# EAGLE board Handclap-TR808 (EAGLE 7.6.0)
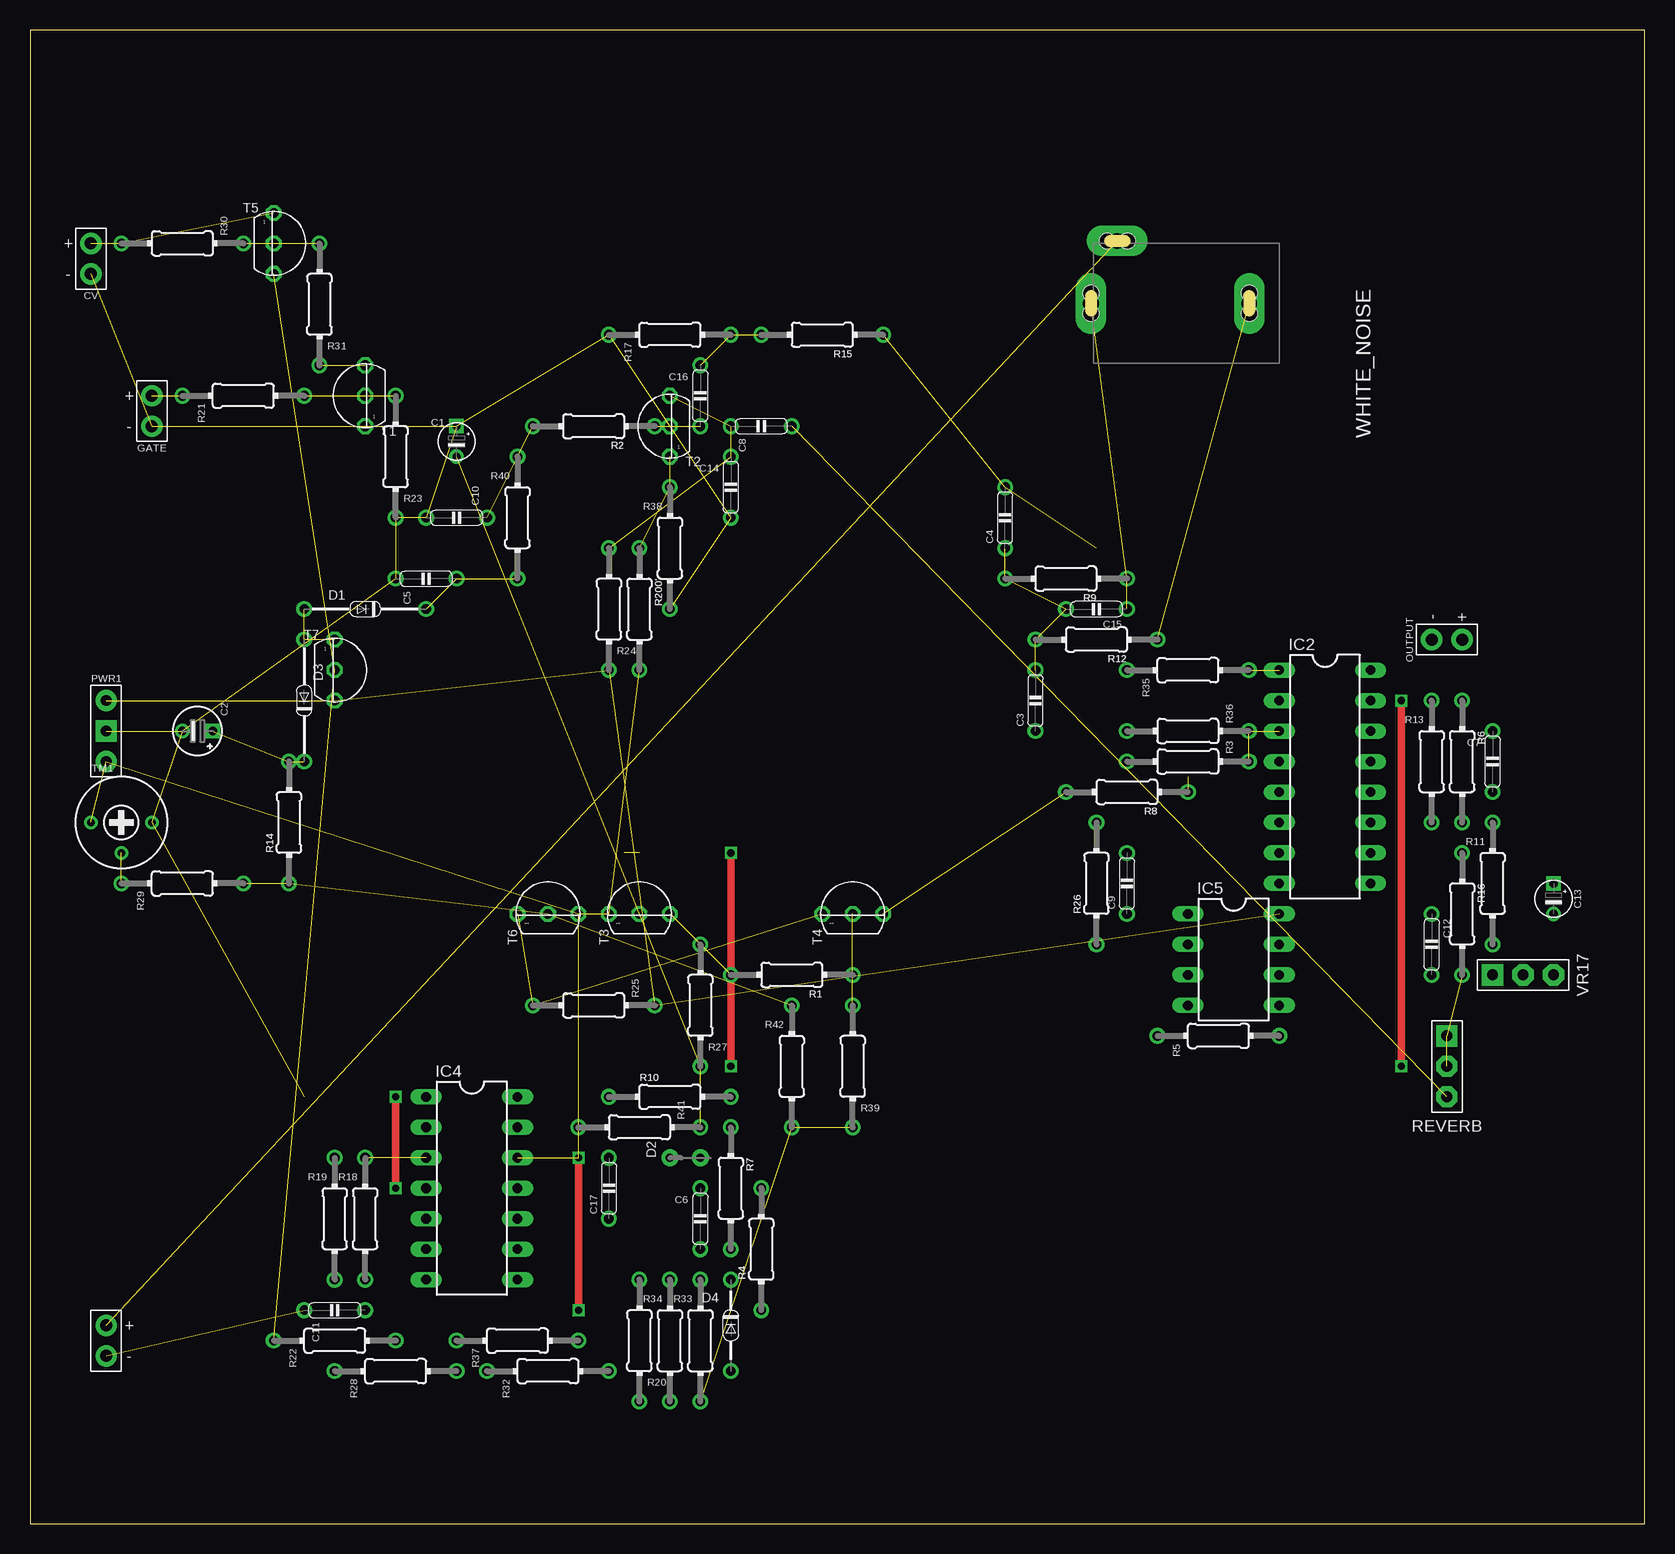
[diagram p0: board, top side]
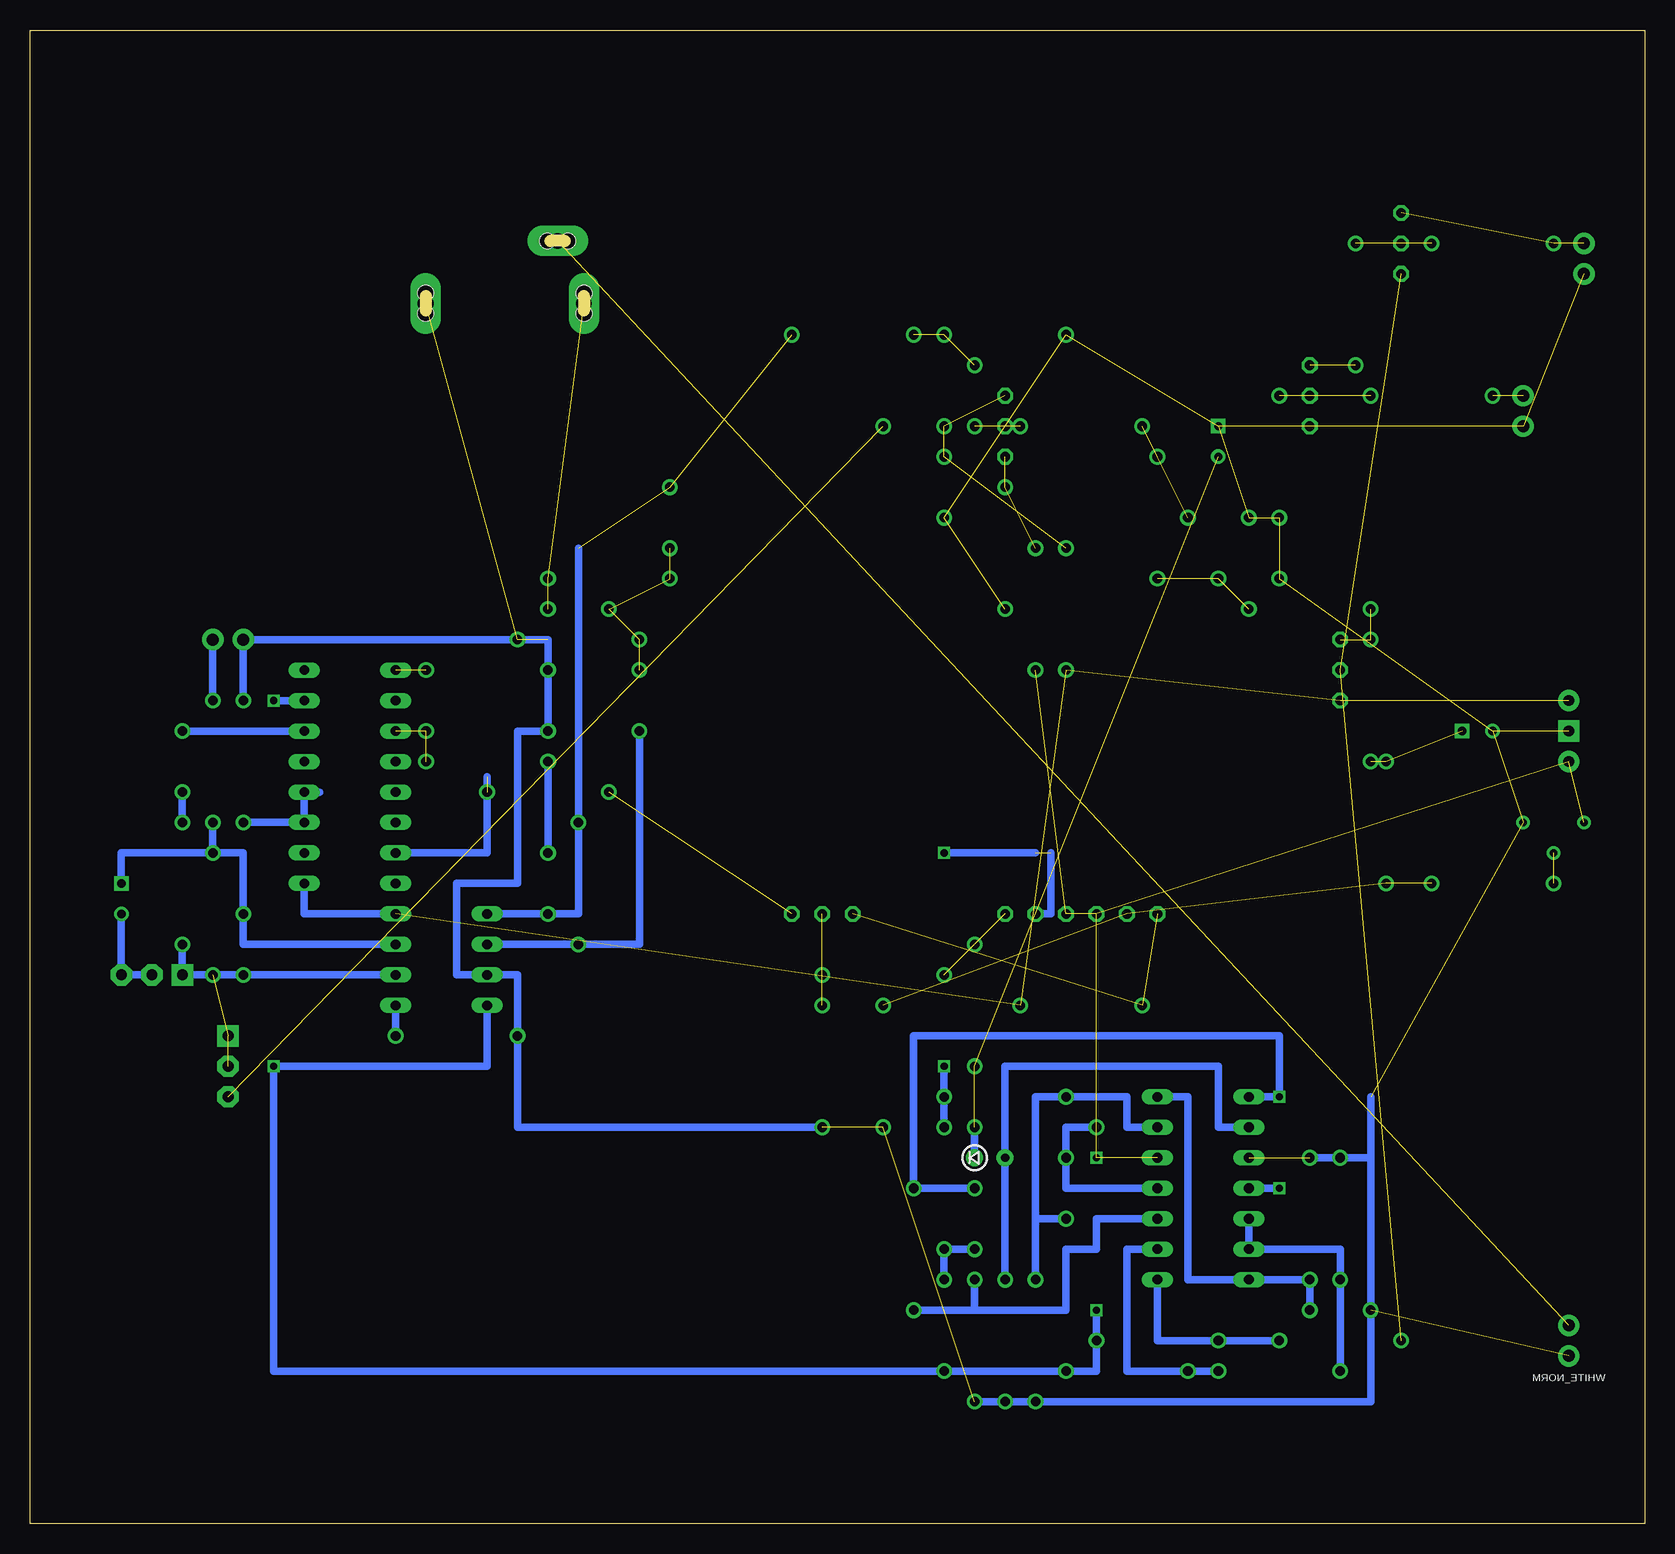
[diagram p1: board, bottom side, seen from below]

Size 134.62 x 124.46 mm. Coordinates in mm from the lower left corner, seen from the top.
Outline: 0,0 134.62,0 134.62,124.46 0,124.46 0,0
Copper layers (1*16): Top 0.035mm / dielectric 1.5mm / Bottom 0.035mm
Design rules "default": minimum track width 10mil, minimum drill 24mil, track to track 8mil, track to pad 8mil, pad to pad 8mil, via to via 8mil, smd to smd 8mil, copper to edge 40mil, drill to drill 8mil, minimum pad ring 10mil, minimum via ring 8mil, stop-mask expansion 4mil, vias tented up to drill 0mil, thermal gap 10mil
Net classes: 0 default: width 0.61 mm; 1 GND: width 0.61 mm; 2 Power: width 0.61 mm; 3 special: width 0.61 mm; 4 15v: width 0.61 mm

## Footprints (pad centres in the part's own frame; a part is rotated, then mirrored left to right if it is on the bottom)
E2,5-3/V = drill 0.7 square: + 0,1.27 | drill 0.7: - 0,-1.27
E2.5-4/V = drill 0.7 square: + 0,1.27 | drill 0.7: - 0,-1.27
C050-020X044 = drill 0.8: 1 -2.54,0; 2 2.54,0
C050-020X044/V = drill 0.8: 1 0,2.54; 2 0,-2.54
E2,5-3 = drill 0.7 square: + -1.27,0 | drill 0.7: - 1.27,0
SPAD-+ = drill 1 pad 1.778: 1 0,-1.27; 2 0,1.27
DO34-10 = drill 0.8: A 5.08,0; C -5.08,0
DO34-2,5-A/V = drill 0.7 pad 1.422: A 0,1.27; C 0,-1.27
DO34-7V = drill 0.8: A 0,-3.81; C 0,3.81
DIL16 = drill 0.8 long: 1 -3.81,8.89; 2 -3.81,6.35; 3 -3.81,3.81; 4 -3.81,1.27; 5 -3.81,-1.27; 6 -3.81,-3.81; 7 -3.81,-6.35; 8 -3.81,-8.89; 9 3.81,-8.89; 10 3.81,-6.35; 11 3.81,-3.81; 12 3.81,-1.27; 13 3.81,1.27; 14 3.81,3.81; 15 3.81,6.35; 16 3.81,8.89
DIL14 = drill 0.8 long: 1 -3.81,7.62; 2 -3.81,5.08; 3 -3.81,2.54; 4 -3.81,0; 5 -3.81,-2.54; 6 -3.81,-5.08; 7 -3.81,-7.62; 8 3.81,-7.62; 9 3.81,-5.08; 10 3.81,-2.54; 11 3.81,0; 12 3.81,2.54; 13 3.81,5.08; 14 3.81,7.62
DIL08 = drill 0.8 pad 1.27 long: 1 -3.81,3.81; 2 -3.81,1.27; 3 -3.81,-1.27; 4 -3.81,-3.81; 5 3.81,-3.81; 6 3.81,-1.27; 7 3.81,1.27; 8 3.81,3.81
SPAD-PWR-+GND- = drill 0.9 pad 1.778 square: GND 0,0 | drill 0.9 pad 1.778: VCC 0,2.54; VEE 0,-2.54
0204/10 = drill 0.8: 1 -5.08,0; 2 5.08,0
0204/10-V = drill 0.8: 1 0,5.08; 2 0,-5.08
CONN-3P = drill 0.9 pad 1.778 square: 1 0,-2.54 | drill 0.9 pad 1.778 octagon: 2 0,0; 3 0,2.54
TO92 = drill 0.8 octagon: 1 0,2.54; 2 0,0; 3 0,-2.54
R-TRIM = drill 0.61: 1 -2.54,0; 2 0,-2.54; 3 2.54,0
ERTHENVAR-JACK-90DEG = drill 1.3 pad 2.54 long: P$1 5,-2.5; P$2 -0.2,-13.5; P$3 5,-15.7 | hole 1.3: 5.842,-2.489; 4.14,-2.489; -0.203,-12.649; -0.203,-14.351; 5.842,-15.697; 4.166,-15.697
SPAD+- = drill 1 pad 1.778: 1 0,-1.27; 2 0,1.27

## Placement (x,y rotation side)
C1  .47/50  [E2,5-3/V]  35.56,90.17 0 top
C2  1/50  [E2.5-4/V]  13.97,66.04 270 top
C3  4.7n  [C050-020X044]  83.82,68.58 90 top
C4  4.7n  [C050-020X044]  81.28,83.82 90 top
C5  18n  [C050-020X044/V]  33.02,78.74 90 top
C6  1n  [C050-020X044/V]  55.88,25.4 0 top
C7  1n  [C050-020X044/V]  121.92,63.5 0 top
C8  4.7n  [C050-020X044/V]  60.96,91.44 90 top
C9  22n  [C050-020X044]  91.44,53.34 90 top
C10  47n  [C050-020X044/V]  35.56,83.82 270 top
C11  27n  [C050-020X044/V]  25.4,17.78 90 top
C12  220p  [C050-020X044]  116.84,48.26 270 top
C13  33/6.3  [E2,5-3]  127,52.07 270 top
C14  18n  [C050-020X044/V]  58.42,86.36 0 top
C15  1.8n  [C050-020X044]  88.9,76.2 180 top
C16  33n  [C050-020X044/V]  55.88,93.98 0 top
C17  220p  [C050-020X044]  48.26,27.94 90 top
CV  [SPAD-+]  5.08,105.41 0 top
D1  1N4148  [DO34-10]  27.94,76.2 180 top
D2  1N4148  [DO34-2,5-A/V]  54.61,30.48 90 top
D3  1N4148  [DO34-10]  22.86,68.58 90 top
D4  1N4148  [DO34-7V]  58.42,16.51 0 top
GATE  [SPAD-+]  10.16,92.71 0 top
IC2  BA6110  [DIL16]  107.95,62.23 0 top
IC4  LM339N  [DIL14]  36.83,27.94 0 top
IC5  TL072P  [DIL08]  100.33,46.99 0 top
OUTPUT  [SPAD-+]  118.11,73.66 270 top
PWR1  -12V_GND_+12V-VCC-VEE  [SPAD-PWR-+GND-]  6.35,66.04 0 top
R1  470K  [0204/10]  63.5,45.72 180 top
R2  1M  [0204/10]  46.99,91.44 180 top
R3  39K  [0204/10-V]  96.52,63.5 270 top
R4  2K7  [0204/10]  60.96,22.86 90 top
R5  47K  [0204/10-V]  99.06,40.64 90 top
R6  1K  [0204/10]  119.38,63.5 270 top
R7  68K  [0204/10]  58.42,27.94 270 top
R8  10K  [0204/10]  91.44,60.96 180 top
R9  27K  [0204/10]  86.36,78.74 180 top
R10  68K  [0204/10]  53.34,35.56 0 top
R11  100K  [0204/10-V]  121.92,53.34 0 top
R12  10K  [0204/10]  88.9,73.66 180 top
R13  82K  [0204/10-V]  116.84,63.5 0 top
R14  330K  [0204/10]  21.59,58.42 90 top
R15  15K  [0204/10]  66.04,99.06 180 top
R16  470K  [0204/10]  119.38,50.8 270 top
R17  680  [0204/10-V]  53.34,99.06 90 top
R18  1M  [0204/10-V]  27.94,25.4 0 top
R19  4K7  [0204/10-V]  25.4,25.4 0 top
R20  10K  [0204/10-V]  50.8,15.24 180 top
R21  22K  [0204/10-V]  17.78,93.98 90 top
R22  27K  [0204/10-V]  25.4,15.24 90 top
R23  10K  [0204/10-V]  30.48,88.9 180 top
R24  10K  [0204/10-V]  48.26,76.2 180 top
R25  15K  [0204/10-V]  46.99,43.18 270 top
R26  150K  [0204/10]  88.9,53.34 90 top
R27  330  [0204/10-V]  55.88,43.18 180 top
R28  4K7  [0204/10-V]  30.48,12.7 90 top
R29  47K  [0204/10-V]  12.7,53.34 90 top
R30  4K7  [0204/10-V]  12.7,106.68 270 top
R31  10K  [0204/10-V]  24.13,101.6 180 top
R32  4K7  [0204/10-V]  43.18,12.7 90 top
R33  5K6  [0204/10-V]  55.88,15.24 0 top
R34  82K  [0204/10-V]  53.34,15.24 0 top
R35  1K  [0204/10-V]  96.52,71.12 90 top
R36  1K  [0204/10-V]  96.52,66.04 270 top
R37  22K  [0204/10-V]  40.64,15.24 90 top
R38  330R  [0204/10-V]  53.34,81.28 0 top
R39  15K  [0204/10-V]  68.58,38.1 180 top
R40  1M  [0204/10-V]  40.64,83.82 0 top
R41  1M  [0204/10-V]  50.8,33.02 270 top
R42  2K2  [0204/10-V]  63.5,38.1 0 top
R200'  10K  [0204/10]  50.8,76.2 270 top
REVERB  100k  [CONN-3P]  118.11,38.1 180 top
T1  2N3904  [TO92]  27.94,93.98 180 top
T2  2N3904  [TO92]  53.34,91.44 180 top
T3  2N3904  [TO92]  50.8,50.8 90 top
T4  2N3906  [TO92]  68.58,50.8 90 top
T5  2N3906  [TO92]  20.32,106.68 0 top
T6  2N3906  [TO92]  43.18,50.8 90 top
T7  2N3904  [TO92]  25.4,71.12 0 top
TM1  10K(B)  [R-TRIM]  7.62,58.42 0 top
VR17  100K(A)  [CONN-3P]  124.46,45.72 270 top
WHITE_NOISE  AUDIO-JACK  [ERTHENVAR-JACK-90DEG]  104.14,106.68 270 top
WHITE_NORM  [SPAD+-]  6.35,15.24 0 top

## Library data of the parts
C1-C17 = c
CV GATE OUTPUT PWR1 WHITE_NORM = pad
D1-D4 = d
IC2 IC4 IC5 = ic
R1-R42 R200' REVERB TM1 VR17 = r
T1-T7 = t
WHITE_NOISE = erthenvar

## Nets
+12V [Power]: IC2.9 IC5.8 PWR1.VCC R24.1 R25.1 T7.3
-12V: D4.A IC2.15 IC4.12 IC5.4 PWR1.VEE R32.2 R37.2 R200'.2 T3.1 T6.3 TM1.1
A_OUT: D2.A IC4.2 R34.1
B_OUT: C6.1 IC4.1 IC4.4 R4.2
C_OUT: C11.2 IC4.7 IC4.14 R18.2
CV: CV.2 R30.2 T5.1
D_OUT: C17.1 IC4.13 R10.1 R20.2
GATE: GATE.2 R21.1
GND [GND]: C1.+ C2.- C5.1 C10.2 C11.1 C14.2 CV.1 GATE.1 IC4.3 IC5.3 OUTPUT.1 PWR1.GND R5.1 R12.1 R13.1 R17.1 R18.1 R19.1 R20.1 R23.1 R33.2 R34.2 R35.1 R36.2 R38.2 R39.1 R42.2 T1.1 TM1.3 WHITE_NOISE.P$1 WHITE_NORM.1
N$1: OUTPUT.2 R6.1
N$2: WHITE_NOISE.P$2 WHITE_NORM.2
N$3: R31.1 T1.3
N$4: R21.2 R23.2 T1.2
N$10: C4.2 C9.1 IC5.1 R15.1 R26.2
N$37: R30.1 R31.2 T5.2
N$40: C16.2 R2.1 T2.2
N$41: C5.2 D1.C R40.2
N$42: R38.1 R200'.1 T2.1
N$43: R22.1 T5.3 T7.2
N$44: D1.A D3.A T7.1
N$45: C10.1 R2.2 R40.1
N$46: C8.1 C14.1 R24.2 T2.3
N$47: C2.+ D3.C R14.2
N$48: R14.1 R29.2 R42.1 T6.2
N$49: R29.1 TM1.2
N$50: C16.1 R15.2 R17.2
N$52: C3.2 C4.1 C15.2 R9.2 R12.2
N$54: C3.1 IC5.2 R26.1
N$55: C9.2 R3.2
N$56: IC2.3 R3.1 R36.1
N$57: C8.2 REVERB.3
N$59: IC2.1 R35.2
N$60: IC2.7 R8.1
N$61: IC2.11 IC2.12 R13.2
N$62: C7.2 R11.1
N$63 [special]: C7.1 IC2.14
N$64: IC4.5 IC4.6 R19.2 R28.1
N$65: C1.- D2.C R27.1 R41.1
N$66: R1.1 R39.2 T4.2
N$67: R25.2 T4.1 T6.1
N$69: R8.2 T4.3
N$70: R1.2 R27.2 T3.3
N$71: IC4.9 R28.2 R32.1
N$72: C17.2 IC4.11 R41.2
N$73: IC4.10 R4.1 R33.1
N$74: IC4.8 R22.2 R37.1
N$75: R7.1 R10.2 T3.2
N$76: C6.2 D4.C R7.2
N$91: IC5.5 R5.2
N$92 [special]: C12.2 IC5.6 R11.2 R16.2 REVERB.1 REVERB.2 VR17.1
N$95: C13.- VR17.2 VR17.3
N$97: C12.1 C13.+ IC5.7 R6.2 R16.1
WN: C15.1 R9.1 WHITE_NOISE.P$3

## Tracks (layer width: path | path; a pad name or v marks a point on that pad's centre or on a via)
+12V  (4 unrouted)
  Bottom 0.61: IC5.8 111.76,50.8 IC2.9
-12V  (via drill 0.6)  (6 unrouted)
  Top 0.61: v45.72,30.48 v45.72,17.78 | v114.3,68.58 v114.3,38.1
  Bottom 0.61: v45.72,17.78 R37.2 45.72,12.7 R32.2 D4.A 114.3,12.7 v114.3,38.1 96.52,38.1 IC5.4 | IC2.15 v114.3,68.58
A_OUT
  Bottom 0.61: IC4.2 35.56,33.02 35.56,38.1 53.34,38.1 D2.A R34.1
B_OUT  (via drill 0.6)
  Top 0.61: v30.48,35.56 v30.48,27.94
  Bottom 0.61: IC4.1 v30.48,35.56 30.48,40.64 60.96,40.64 60.96,29.21 R4.2 | v30.48,27.94 IC4.4 | R4.2 C6.1 R4.2
C_OUT
  Bottom 0.61: IC4.14 38.1,35.56 38.1,20.32 IC4.7 R18.2 C11.2
CV  (2 unrouted)
D_OUT
  Bottom 0.61: IC4.13 43.18,33.02 43.18,35.56 R10.1 50.8,35.56 50.8,25.4 | R20.2 50.8,25.4 | C17.1 50.8,25.4
GATE  (1 unrouted)
GND  (19 unrouted)
  Bottom 0.61: 22.86,30.48 R18.1 R19.1 | 22.86,30.48 22.86,35.56 | R33.2 R34.2 R20.1 22.86,10.16 C11.1 22.86,30.48 | R13.1 OUTPUT.1 91.44,73.66 R35.1 R36.2 93.98,66.04 93.98,53.34 99.06,53.34 99.06,45.72 IC5.3 93.98,45.72 R5.1 93.98,33.02 R39.1
N$1
  Bottom 0.61: OUTPUT.2 R6.1
N$2  (1 unrouted)
N$3  (1 unrouted)
N$4  (2 unrouted)
N$10  (2 unrouted)
  Bottom 0.61: 88.9,81.28 R26.2 88.9,50.8 C9.1 IC5.1
N$37  (2 unrouted)
N$40  (2 unrouted)
N$41  (2 unrouted)
N$42  (2 unrouted)
N$43  (2 unrouted)
N$44  (2 unrouted)
N$45  (2 unrouted)
N$46  (3 unrouted)
N$47  (2 unrouted)
N$48  (3 unrouted)
N$49  (1 unrouted)
N$50  (2 unrouted)
N$52  (4 unrouted)
N$54
  Bottom 0.61: IC5.2 R26.1 83.82,48.26 C3.1
N$55
  Bottom 0.61: R3.2 C9.2
N$56  (2 unrouted)
N$57  (1 unrouted)
N$59  (1 unrouted)
N$60  (1 unrouted)
  Bottom 0.61: IC2.7 96.52,55.88 96.52,62.23
N$61
  Bottom 0.61: R13.2 IC2.11 IC2.12 110.49,60.96
N$62
  Bottom 0.61: C7.2 R11.1
N$63
  Bottom 0.61: IC2.14 C7.1
N$64
  Bottom 0.61: R28.1 R19.2 25.4,22.86 IC4.6 IC4.5
N$65  (2 unrouted)
  Bottom 0.61: R41.1 D2.C
N$66  (2 unrouted)
N$67  (2 unrouted)
N$69  (1 unrouted)
N$70  (2 unrouted)
N$71
  Bottom 0.61: IC4.9 43.18,22.86 43.18,12.7 R32.1 R28.2
N$72
  Bottom 0.61: IC4.11 48.26,27.94 C17.2 48.26,33.02 R41.2
N$73
  Bottom 0.61: 55.88,17.78 48.26,17.78 48.26,22.86 45.72,22.86 45.72,25.4 IC4.10 | R33.1 55.88,17.78 | 55.88,17.78 57.15,17.78 R4.1
N$74
  Bottom 0.61: IC4.8 40.64,15.24 R37.1 R22.2
N$75  (via drill 0.6)  (1 unrouted)
  Top 0.61: v58.42,38.1 v58.42,55.88
  Bottom 0.61: R10.2 R7.1 v58.42,38.1 | v58.42,55.88 50.8,55.88 | T3.2 49.53,50.8 49.53,55.88
N$76
  Bottom 0.61: C6.2 R7.2 D4.C
N$91
  Bottom 0.61: R5.2 IC5.5
N$92  (2 unrouted)
  Bottom 0.61: IC5.6 C12.2 R16.2 VR17.1 | 121.92,46.99 VR17.1 | VR17.1 R11.2
N$95
  Bottom 0.61: C13.- VR17.3 VR17.2
N$97
  Bottom 0.61: IC5.7 116.84,48.26 C12.1 116.84,55.88 R16.1 | R6.2 R16.1 | R16.1 127,55.88 C13.+
WN  (2 unrouted)